# Altium PCB LEDArray8Key.PcbDoc (part 3 of 3)
Units mil, origin at the board's own origin, x right, y up, seen from the top; angles counter-clockwise.
Board outline 4724.41 x 3343 mil, 2 copper layers (Top Layer, Bottom Layer); 229 components, 203 nets, 838 pads, 171 vias.
Unrouted connection lines stored in the file: 34.
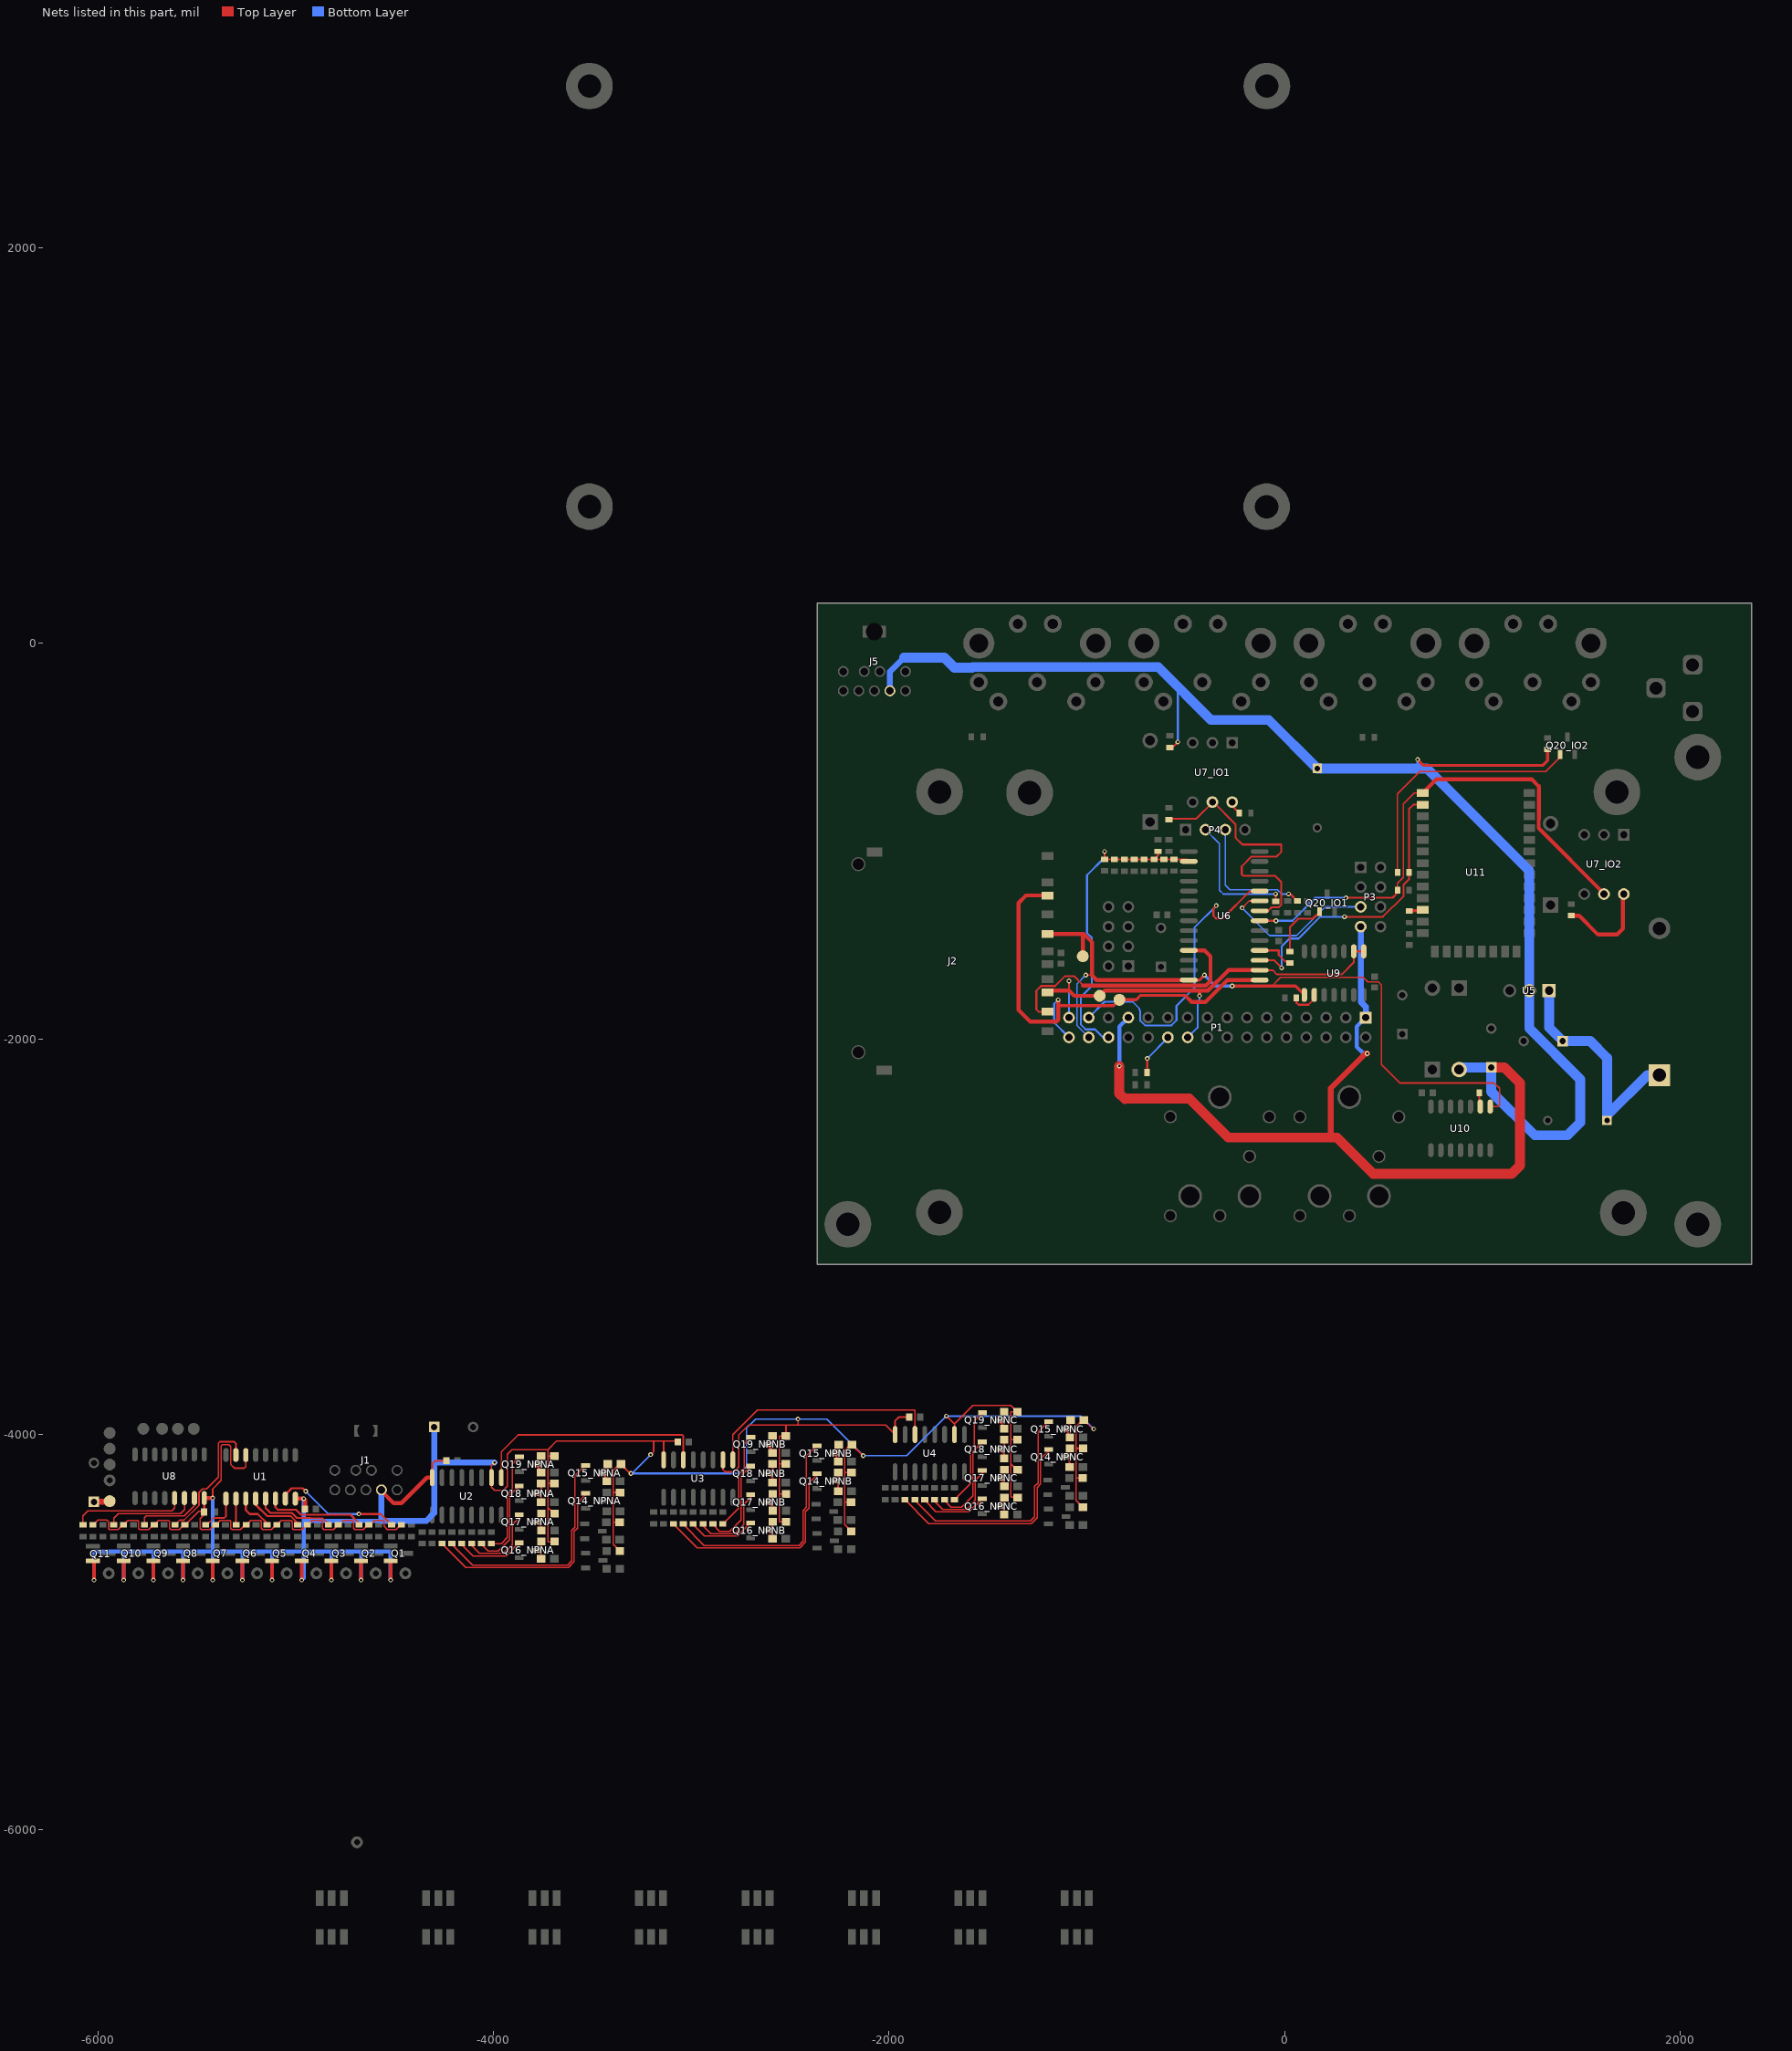
[diagram p3: the nets of this part, all layers, seen from the top]

## Via types
v1: diameter 23.62, hole 11.81, Top Layer to Bottom Layer, 171 vias

## Nets (pads, with @x,y where several pads share a name; then routed paths per layer and width w, separated by ;. In a path a pad name is that pad's centre, name@x,y a point inside that pad or via, vN(x,y) a via of type N, cw(c..) or ccw(c..) an arc to the next point about the centre after c; other vN are vias at no path point) (continued)
NetQ14_NPNA_2: Q14_NPNA.2 R9_NPNA.2 | length 1095.7
  Top Layer w6: R9_NPNA.2@-4259.92,-4557.16 R9_NPNA.2@-4259.92,-4553.1 -4139.39,-4673.63 -3621.03,-4673.63 -3591.92,-4644.52 -3591.92,-4491.21 -3574.92,-4474.21 -3574.92,-4347.52 Q14_NPNA.2@-3534.21,-4306.81
NetQ14_NPNB_1: Q14_NPNB.1 R7_NPNB.2 R8_NPNB.2 | length 90
  Top Layer w10: R7_NPNB.2@-2258.39,-4293.15 -2258.39,-4265.39 R8_NPNB.2@-2258.39,-4203.15
NetQ14_NPNB_2: Q14_NPNB.2 R9_NPNB.2 | length 1095.7
  Top Layer w6: R9_NPNB.2@-3089.92,-4457.16 R9_NPNB.2@-3089.92,-4453.1 -2969.39,-4573.63 -2451.03,-4573.63 -2421.92,-4544.52 -2421.92,-4391.21 -2404.92,-4374.21 -2404.92,-4247.52 Q14_NPNB.2@-2364.21,-4206.81
NetQ14_NPNC_1: Q14_NPNC.1 R7_NPNC.2 R8_NPNC.2 | length 90
  Top Layer w10: R7_NPNC.2@-1087.56,-4170.55 -1087.56,-4142.8 R8_NPNC.2@-1087.56,-4080.55
NetQ14_NPNC_2: Q14_NPNC.2 R9_NPNC.2 | length 1095.7
  Top Layer w6: R9_NPNC.2@-1919.09,-4334.57 R9_NPNC.2@-1919.09,-4330.5 -1798.56,-4451.03 -1280.2,-4451.03 -1251.09,-4421.92 -1251.09,-4268.61 -1234.09,-4251.61 -1234.09,-4124.92 Q14_NPNC.2@-1193.39,-4084.21
NetQ15_NPNA_1: Q15_NPNA.1 R10_NPNA.2 R11_NPNA.2 | length 104.3
  Top Layer w10: R10_NPNA.2@-3428.39,-4248.15 -3428.39,-4220.39 -3445.63,-4203.15 -3428.39,-4185.91 R11_NPNA.2@-3428.39,-4158.15
NetQ15_NPNA_2: Q15_NPNA.2 R12_NPNA.2 | length 1174.1
  Top Layer w6: R12_NPNA.2@-4209.92,-4553.1 -4209.92,-4557.16 -4105.45,-4661.63 -3626,-4661.63 -3603.92,-4639.55 -3603.92,-4486.24 -3586.92,-4469.24 -3586.92,-4209.52 -3534.63,-4157.22 Q15_NPNA.2@-3534.21,-4156.81
NetQ15_NPNB_1: Q15_NPNB.1 R10_NPNB.2 R11_NPNB.2 | length 104.3
  Top Layer w10: R10_NPNB.2@-2258.39,-4148.15 -2258.39,-4120.39 -2275.63,-4103.15 -2258.39,-4085.91 R11_NPNB.2@-2258.39,-4058.15
NetQ15_NPNB_2: Q15_NPNB.2 R12_NPNB.2 | length 1174.1
  Top Layer w6: R12_NPNB.2@-3039.92,-4453.1 -3039.92,-4457.16 -2935.45,-4561.63 -2456,-4561.63 -2433.92,-4539.55 -2433.92,-4386.24 -2416.92,-4369.24 -2416.92,-4109.52 -2364.63,-4057.22 Q15_NPNB.2@-2364.21,-4056.81
NetQ15_NPNC_1: Q15_NPNC.1 R10_NPNC.2 R11_NPNC.2 | length 104.3
  Top Layer w10: R10_NPNC.2@-1087.56,-4025.55 -1087.56,-3997.8 -1104.8,-3980.55 -1087.56,-3963.31 R11_NPNC.2@-1087.56,-3935.55
NetQ15_NPNC_2: Q15_NPNC.2 R12_NPNC.2 | length 1174.1
  Top Layer w6: R12_NPNC.2@-1869.09,-4330.5 -1869.09,-4334.57 -1764.63,-4439.03 -1285.18,-4439.03 -1263.09,-4416.95 -1263.09,-4263.64 -1246.09,-4246.64 -1246.09,-3986.92 -1193.8,-3934.63 Q15_NPNC.2@-1193.39,-3934.21
NetQ16_NPNA_1: Q16_NPNA.1 R13_NPNA.2 R14_NPNA.2 | length 108.4
  Top Layer w10: R13_NPNA.2@-3758.39,-4628.57 -3758.39,-4605.81 -3780.63,-4583.57 -3758.39,-4561.33 R14_NPNA.2@-3758.39,-4538.57
NetQ16_NPNA_2: Q16_NPNA.2 R15_NPNA.2 | length 353.6
  Top Layer w6: R15_NPNA.2@-4159.92,-4553.1 -4159.92,-4557.16 -4102.45,-4614.63 -3936.62,-4614.63 Q16_NPNA.2@-3864.21,-4542.23
NetQ16_NPNB_1: Q16_NPNB.1 R13_NPNB.2 R14_NPNB.2 | length 108.4
  Top Layer w10: R13_NPNB.2@-2588.39,-4528.57 -2588.39,-4505.81 -2610.63,-4483.57 -2588.39,-4461.33 R14_NPNB.2@-2588.39,-4438.57
NetQ16_NPNB_2: Q16_NPNB.2 R15_NPNB.2 | length 353.6
  Top Layer w6: R15_NPNB.2@-2989.92,-4453.1 -2989.92,-4457.16 -2932.45,-4514.63 -2766.62,-4514.63 Q16_NPNB.2@-2694.21,-4442.23
NetQ16_NPNC_1: Q16_NPNC.1 R13_NPNC.2 R14_NPNC.2 | length 108.4
  Top Layer w10: R13_NPNC.2@-1417.56,-4405.97 -1417.56,-4383.22 -1439.8,-4360.97 -1417.56,-4338.73 R14_NPNC.2@-1417.56,-4315.97
NetQ16_NPNC_2: Q16_NPNC.2 R15_NPNC.2 | length 353.6
  Top Layer w6: R15_NPNC.2@-1819.09,-4330.5 -1819.09,-4334.57 -1761.63,-4392.03 -1595.79,-4392.03 Q16_NPNC.2@-1523.39,-4319.63
NetQ17_NPNA_1: Q17_NPNA.1 R16_NPNA.2 R17_NPNA.2 | length 108.4
  Top Layer w10: R16_NPNA.2@-3758.39,-4488.57 -3758.39,-4465.81 Q17_NPNA.1@-3780.63,-4443.57 -3758.39,-4421.33 R17_NPNA.2@-3758.39,-4398.57
NetQ17_NPNA_2: Q17_NPNA.2 R18_NPNA.2 | length 424.4
  Top Layer w6: R18_NPNA.2@-4109.92,-4553.1 -4109.92,-4562.44 -4069.92,-4602.44 -4069.92,-4602.63 -3949.95,-4602.63 -3904.95,-4557.63 -3904.95,-4455.58 -3864.21,-4414.84 Q17_NPNA.2@-3864.21,-4399.83
NetQ17_NPNB_1: Q17_NPNB.1 R16_NPNB.2 R17_NPNB.2 | length 108.4
  Top Layer w10: R16_NPNB.2@-2588.39,-4388.57 -2588.39,-4365.81 Q17_NPNB.1@-2610.63,-4343.57 -2588.39,-4321.33 R17_NPNB.2@-2588.39,-4298.57
NetQ17_NPNB_2: Q17_NPNB.2 R18_NPNB.2 | length 424.4
  Top Layer w6: R18_NPNB.2@-2939.92,-4453.1 -2939.92,-4462.44 -2899.92,-4502.44 -2899.92,-4502.63 -2779.95,-4502.63 -2734.95,-4457.63 -2734.95,-4355.58 -2694.21,-4314.84 Q17_NPNB.2@-2694.21,-4299.83
NetQ17_NPNC_1: Q17_NPNC.1 R16_NPNC.2 R17_NPNC.2 | length 108.4
  Top Layer w10: R16_NPNC.2@-1417.56,-4265.97 -1417.56,-4243.22 Q17_NPNC.1@-1439.8,-4220.97 -1417.56,-4198.73 R17_NPNC.2@-1417.56,-4175.97
NetQ17_NPNC_2: Q17_NPNC.2 R18_NPNC.2 | length 424.4
  Top Layer w6: R18_NPNC.2@-1769.09,-4330.5 -1769.09,-4339.84 -1729.09,-4379.84 -1729.09,-4380.03 -1609.12,-4380.03 -1564.12,-4335.03 -1564.12,-4232.98 -1523.39,-4192.24 Q17_NPNC.2@-1523.39,-4177.23
NetQ18_NPNA_1: Q18_NPNA.1 R19_NPNA.2 R20_NPNA.2 | length 108.4
  Top Layer w10: R19_NPNA.2@-3758.39,-4343.57 -3758.39,-4320.81 Q18_NPNA.1@-3780.63,-4298.57 -3758.39,-4276.33 R20_NPNA.2@-3758.39,-4253.57
NetQ18_NPNA_2: Q18_NPNA.2 R21_NPNA.2 | length 487.9
  Top Layer w6: R21_NPNA.2@-4059.92,-4553.1 -4059.92,-4557.16 -4026.45,-4590.63 -3974.92,-4590.63 -3916.95,-4532.66 -3916.95,-4309.97 Q18_NPNA.2@-3864.92,-4257.94 ; Q18_NPNA.2@-3864.92,-4263.66 Q18_NPNA.2@-3864.92,-4257.94 ; Q18_NPNA.2@-3864.21,-4257.23 Q18_NPNA.2@-3864.92,-4257.94
NetQ18_NPNB_1: Q18_NPNB.1 R19_NPNB.2 R20_NPNB.2 | length 108.4
  Top Layer w10: R19_NPNB.2@-2588.39,-4243.57 -2588.39,-4220.81 Q18_NPNB.1@-2610.63,-4198.57 -2588.39,-4176.33 R20_NPNB.2@-2588.39,-4153.57
NetQ18_NPNB_2: Q18_NPNB.2 R21_NPNB.2 | length 487.9
  Top Layer w6: R21_NPNB.2@-2889.92,-4453.1 -2889.92,-4457.16 -2856.45,-4490.63 -2804.92,-4490.63 -2746.95,-4432.66 -2746.95,-4209.97 Q18_NPNB.2@-2694.92,-4157.94 ; Q18_NPNB.2@-2694.92,-4163.66 Q18_NPNB.2@-2694.92,-4157.94 ; Q18_NPNB.2@-2694.21,-4157.23 Q18_NPNB.2@-2694.92,-4157.94
NetQ18_NPNC_1: Q18_NPNC.1 R19_NPNC.2 R20_NPNC.2 | length 108.4
  Top Layer w10: R19_NPNC.2@-1417.56,-4120.97 -1417.56,-4098.22 Q18_NPNC.1@-1439.8,-4075.97 -1417.56,-4053.73 R20_NPNC.2@-1417.56,-4030.97
NetQ18_NPNC_2: Q18_NPNC.2 R21_NPNC.2 | length 487.9
  Top Layer w6: R21_NPNC.2@-1719.09,-4330.5 -1719.09,-4334.57 -1685.63,-4368.03 -1634.09,-4368.03 -1576.12,-4310.06 -1576.12,-4087.37 Q18_NPNC.2@-1524.09,-4035.34 ; Q18_NPNC.2@-1524.09,-4041.06 Q18_NPNC.2@-1524.09,-4035.34 ; Q18_NPNC.2@-1523.39,-4034.63 Q18_NPNC.2@-1524.09,-4035.34
NetQ19_NPNA_1: Q19_NPNA.1 R22_NPNA.2 R23_NPNA.2 | length 108.4
  Top Layer w10: R22_NPNA.2@-3758.39,-4203.57 -3758.39,-4180.81 -3780.63,-4158.57 -3758.39,-4136.33 R23_NPNA.2@-3758.39,-4113.57
NetQ19_NPNA_2: Q19_NPNA.2 R24_NPNA.2 | length 527.2
  Top Layer w6: R24_NPNA.2@-4009.92,-4553.1 -3959.87,-4553.1 -3928.95,-4522.18 -3928.95,-4303.15 -3904.92,-4279.12 -3904.92,-4150.18 Q19_NPNA.2@-3868.5,-4113.77
NetQ19_NPNB_1: Q19_NPNB.1 R22_NPNB.2 R23_NPNB.2 | length 108.4
  Top Layer w10: R22_NPNB.2@-2588.39,-4103.57 -2588.39,-4080.81 -2610.63,-4058.57 -2588.39,-4036.33 R23_NPNB.2@-2588.39,-4013.57
NetQ19_NPNB_2: Q19_NPNB.2 R24_NPNB.2 | length 498.3
  Top Layer w6: R24_NPNB.2@-2839.92,-4453.1 -2759.45,-4372.63 -2758.95,-4372.13 ; -2759.95,-4273.15 -2759.95,-4201.25 -2731.85,-4173.15 -2731.85,-4047.11 Q19_NPNB.2@-2698.51,-4013.77
  Top Layer w8: -2759.95,-4372.13 -2759.95,-4273.15
NetQ19_NPNC_1: Q19_NPNC.1 R22_NPNC.2 R23_NPNC.2 | length 108.4
  Top Layer w10: R22_NPNC.2@-1417.56,-3980.97 -1417.56,-3958.22 -1439.8,-3935.97 -1417.56,-3913.73 R23_NPNC.2@-1417.56,-3890.97
NetQ19_NPNC_2: Q19_NPNC.2 R24_NPNC.2 | length 497.9
  Top Layer w6: R24_NPNC.2@-1669.09,-4330.5 -1588.12,-4249.53 -1588.12,-4071.35 -1569.92,-4053.15 -1569.92,-3933.41 Q19_NPNC.2@-1527.68,-3891.17
NetQ20_IO1_2: Q20_IO1.2 R65_IO1.1 | length 305.6
  Top Layer w10: R65_IO1.1@27.27,-1558.62 27.27,-1435.96 70.08,-1393.15 141.97,-1393.15 Q20_IO1.2@177.68,-1357.44
NetQ20_IO2_2: Q20_IO2.2 R65_IO2.1 | length 1309
  Top Layer w8: R65_IO2.1@570.55,-1158.15 570.55,-762.66 683.83,-649.39 1320.08,-649.39 1391.97,-577.5 Q20_IO2.2@1391.97,-563.15
  Top Layer w10: Q20_IO2.2@1391.97,-563.15 Q20_IO2.2@1392.68,-562.44
NetR25_1: R25.1 U1.15 | length 719.1
  Top Layer w10: U1.15@-5051.92,-4332.08 U1.15@-5051.92,-4325.39 -5051.92,-4305.11 -5019.97,-4273.15 -4964.21,-4273.15 v1(-4949.1,-4288.26) ; v1(-4679.92,-4403.15) -4570.39,-4403.15 R25.1@-4514.92,-4458.62 ; -4560.92,-4412.15 R25.1@-4514.92,-4458.15
  Bottom Layer w10: v1(-4949.1,-4288.26) -4834.21,-4403.15 v1(-4679.92,-4403.15)
NetR26_1: R26.1 U1.14 | length 508.1
  Top Layer w10: U1.14@-5101.92,-4325.39 -5101.92,-4369.15 -5089.92,-4381.15 -4998.5,-4381.15 -4972.78,-4406.87 -4722.65,-4406.87 -4679.92,-4449.6 R26.1@-4679.92,-4458.62
NetR27_1: R27.1 U1.13 | length 404.1
  Top Layer w6: -4924.92,-4423.15 -4864.2,-4423.15 -4834.92,-4452.43 R27.1@-4834.92,-4458.62
  Top Layer w10: U1.13@-5151.92,-4325.39 -5151.92,-4373.65 -5128.42,-4397.15 -5019.74,-4397.15 -4993.74,-4423.15 -4924.92,-4423.15
NetR28_1: R28.1 U1.12 | length 290.5
  Top Layer w10: U1.12@-5201.92,-4325.39 -5201.92,-4356.15 -5144.92,-4413.15 -5026.37,-4413.15 -4989.92,-4449.6 R28.1@-4989.92,-4458.62
NetR29_1: R29.1 U1.11 | length 224.9
  Top Layer w6: U1.11@-5254.92,-4351.34 U1.11@-5254.92,-4328.15
  Top Layer w10: U1.11@-5251.92,-4325.39 -5251.92,-4383.79 -5232.56,-4403.15 -5191.37,-4403.15 -5144.92,-4449.6 R29.1@-5144.92,-4458.62
NetR30_1: R30.1 U1.10 | length 136.9
  Top Layer w6: U1.10@-5301.92,-4325.39 U1.10@-5299.92,-4327.39
  Top Layer w10: U1.10@-5301.92,-4325.39 -5301.92,-4456.62 R30.1@-5299.92,-4458.62
NetR31_1: R31.1 U1.9 | length 210.6
  Top Layer w8: R31.1@-5454.92,-4458.62 -5450.56,-4458.62 -5414.78,-4422.84 -5359.92,-4422.84 -5351.92,-4414.84 U1.9@-5351.92,-4325.39
NetR32_1: R32.1 U1.7 | length 684.3
  Top Layer w8: R32.1@-5608.62,-4458.62 R32.1@-5609.92,-4458.62 -5586.14,-4434.84 -5564.84,-4434.84 -5488.14,-4358.15 -5488.14,-4293.32 -5471.77,-4276.95 -5450.51,-4276.95 -5390.14,-4216.58 -5390.14,-4044.59 -5383.71,-4038.15 -5309.92,-4038.15 -5301.92,-4046.15 U1.7@-5301.92,-4104.91
NetR33_1: R33.1 U8.15 | length 359.1
  Top Layer w6: R33.1@-5759.15,-4458.62 R33.1@-5764.92,-4458.62 -5764.92,-4422.15 -5754.92,-4412.15 -5563.23,-4412.15 -5511.92,-4360.84 U8.15@-5511.92,-4322.39
NetR34_1: R34.1 U8.14 | length 467.9
  Top Layer w6: R34.1@-5919.92,-4458.62 -5919.92,-4425.15 -5894.92,-4400.15 -5581.92,-4400.15 -5561.92,-4380.15 U8.14@-5561.92,-4322.39
NetR35_1: R35.1 U8.13 | length 576.2
  Top Layer w6: R35.1@-6074.92,-4458.62 -6074.92,-4413.15 -6049.92,-4388.15 -5626.26,-4388.15 -5611.92,-4373.81 U8.13@-5611.92,-4322.39
NetR60_IO1_1: R60_IO1.1 U7_IO1.6 | length 76.1
  Top Layer w10: U7_IO1.6@-260.39,-798.62 U7_IO1.6@-264.92,-803.15 -264.92,-822.68 R60_IO1.1@-229.45,-858.15
NetR60_IO2_1: R60_IO2.1 U7_IO2.6 | length 493.3
  Top Layer w20: R60_IO2.1@1450.08,-1377.68 1489.61,-1377.68 1585.08,-1473.15 1680.08,-1473.15 1710.08,-1443.15 1710.08,-1269.12 1709.11,-1268.15 U7_IO2.6@1715.08,-1268.15
NetR62_1: R62.1 U9.9 | length 151.5
  Top Layer w10: R62.1@59.61,-1793.15 59.61,-1817.68 70.08,-1828.15 120.08,-1828.15 150.08,-1798.15 U9.9@150.08,-1778.39
NetR80_1: R80.1 U10.9 | length 61.6
  Top Layer w10: R80.1@985.25,-2283.15 985.25,-2338.39 U10.9@989.78,-2342.91
NetR81_2: R81.2 U11.11 | length 69.8
  Top Layer w15: R81.2@630.08,-1352.14 694.36,-1352.14 U11.11@698.27,-1348.23
NetU2_9: U2.9 U3.14 | length 1209.8
  Top Layer w8: U2.9@-3959.92,-4219.08 -3959.92,-4088.15 -3874.92,-4003.15 -3044.92,-4003.15 -3039.48,-4008.59 U3.14@-3039.48,-4129.6
NetU3_9: U3.9 U4.14 | length 1221.9
  Top Layer w6: U3.9@-2789.48,-4129.6 -2789.48,-4002.71 -2664.92,-3878.15 -1869.09,-3878.15 -1869.09,-4000.73 U4.14@-1868.8,-4001.02
PGCLK: P4.3 R74.1 | length 678.5
  Top Layer w10: v1(20.08,-1268.15) 29.13,-1268.15 R74.1@65.08,-1304.09
  Bottom Layer w8: P4.3@-299.92,-943.15 -299.92,-1223.15 -276.73,-1246.34 -35.89,-1246.34 -14.08,-1268.15 v1(20.08,-1268.15)
PGDAT: P4.2 R76.1 | length 662.8
  Top Layer w8: R76.1@-44.92,-1303.62 v1(-44.92,-1268.15)
  Bottom Layer w8: P4.2@-399.92,-943.15 -329.92,-1013.15 -329.92,-1248.15 -309.92,-1268.15 v1(-44.92,-1268.15)
RD: P1.22 R78.1 | length 221.4
  Top Layer w10: R78.1@-695.47,-2170.87 -694.17,-2169.57 v1(-694.17,-2100)
  Bottom Layer w10: v1(-694.17,-2100) -589.92,-1995.75 P1.22@-589.92,-1993.15
RX1: R61_IO1.1 U6.22 U7_IO1.5 | length 1495.9
  Top Layer w10: R61_IO1.1@-584.92,-887.68 -446.82,-887.68 -364.92,-805.78 U7_IO1.5@-364.92,-803.15 -360.17,-803.15 -248.32,-915 -248.32,-983.15 -213.32,-1018.15 -16.21,-1018.15 -16.21,-1054.65 -40.7,-1079.15 -167.83,-1079.15 -216.83,-1128.15 -216.83,-1168.15 -209.01,-1175.96 -48.39,-1175.96 -16.21,-1208.15 -16.21,-1322.96 -28.87,-1335.63 -64.92,-1335.63 -82.45,-1353.15 U6.22@-125.79,-1353.15
RX2: R61_IO2.1 U6.21 U7_IO2.5 U11.1 | length 2634.6
  Top Layer w8: R61_IO2.1@570.55,-1248.15 570.55,-1214.35 600.08,-1184.82 600.08,-812.68 655.08,-757.68 U11.1@698.27,-757.68
  Top Layer w10: U6.21@-125.79,-1403.15 v1(-43.6,-1403.15) ; v1(310.08,-1287.18) 546.05,-1287.18 R61_IO2.1@570.08,-1263.15
  Top Layer w20: U11.1@698.27,-757.68 767.79,-688.15 1250.08,-688.15 1285.08,-723.15 1285.08,-888.57 1284.71,-888.94 1284.71,-935.18 1615.08,-1265.55 U7_IO2.5@1615.08,-1268.15
  Bottom Layer w10: v1(-43.6,-1403.15) 40.08,-1403.15 156.05,-1287.18 v1(310.08,-1287.18)
SD_CS: J2.1 U6.11 | length 1344.4
  Top Layer w10: J2.1@-1197.84,-1863.31 -1243.16,-1863.31 -1254.92,-1851.55 -1254.92,-1757.2 -1231.92,-1734.2 -1230.97,-1734.2 -1229.92,-1733.15 -1159.92,-1733.15 -1109.92,-1683.15 -1064.92,-1683.15 -1019.92,-1728.15 -1019.92,-1730.96
  Top Layer w20: -1019.92,-1730.96 -397.73,-1730.96 -374.92,-1708.15 -374.92,-1583.15 -404.92,-1553.15 U6.11@-484.06,-1553.15
SPARE: P3.5 U6.23 | length 821.7
  Top Layer w8: v1(-214.92,-1338.15) -179.92,-1303.15 U6.23@-125.79,-1303.15
  Bottom Layer w8: v1(-214.92,-1338.15) -74.92,-1478.15 60.08,-1478.15 205.08,-1333.15 P3.5@385.08,-1333.15
SPI_CLK: J2.5 P1.30 pad.0@-1019.97,-1583.15 U6.14 U9.8 U10.8 | length 3940.7
  Top Layer w8: v1(-1004.92,-1678.15) -974.92,-1678.15 ; -65,-1733.15 -63.15,-1733.15 -20,-1690 396.85,-1690 420,-1713.15 475.08,-1713.15 476.89,-1714.96 ; 476.94,-1714.96 490.08,-1728.1 490.08,-2129.7 584.57,-2224.19 1060.08,-2224.19 1087.09,-2251.19 1087.09,-2333.15 1077.32,-2342.91 U10.8@1039.78,-2342.91
  Top Layer w15: U6.14@-484.06,-1703.15 -429.92,-1703.15 v1(-404.92,-1678.15) ; v1(-264.92,-1733.15) -65,-1733.15 ; -63.15,-1733.15 54.84,-1733.15 U9.8@100.08,-1778.39
  Top Layer w20: J2.5@-1197.84,-1469.61 -1016.27,-1469.61 ; pad.0@-1019.97,-1583.15 -1019.97,-1473.31 -1016.27,-1469.61 ; -974.92,-1678.15 -974.92,-1554.61 ; U6.14@-484.06,-1703.15 -949.92,-1703.15 -972.73,-1680.34 -972.73,-1513.15 -1016.27,-1469.61
  Bottom Layer w8: v1(-1004.92,-1678.15) -1049.92,-1723.15 -1049.92,-1933.15 P1.30@-989.92,-1993.15
  Bottom Layer w15: v1(-404.92,-1678.15) -349.92,-1733.15 v1(-264.92,-1733.15)
SPI_MISO: J2.7 P1.32 pad.0@-834.92,-1803.15 U6.15 | length 2365.6
  Top Layer w10: -499.3,-1778.96 -498.13,-1780.13
  Top Layer w15: -1144.83,-1833.15 -864.92,-1833.15 pad.0@-834.92,-1803.15 -750.36,-1803.15 -727.67,-1780.46 -499.3,-1780.46
  Top Layer w20: J2.7@-1197.84,-1275.51 -1307.28,-1275.51 -1344.92,-1313.15 -1344.92,-1854.23 -1286,-1913.15 -1153.83,-1913.15 -1144.83,-1904.15 -1144.83,-1833.15 v1(-1144.83,-1803.06) ; -500.95,-1782.96 -469.76,-1814.15 -399.92,-1814.15 -288.92,-1703.15 U6.15@-125.79,-1703.15
  Bottom Layer w10: v1(-1144.83,-1803.06) -1164.92,-1823.15 -1164.92,-1918.15 P1.32@-1089.92,-1993.15
SPI_MOSI: J2.2 P1.20 P1.31 pad.0@-934.92,-1783.15 U6.16 U9.1 U9.2 | length 2250.6
  Top Layer w10: -1089.92,-1756.96 v1(-1089.92,-1708.15) ; U6.16@-125.79,-1653.15 -59.92,-1653.15 -38.07,-1675 288.23,-1675 350.08,-1613.15 U9.2@350.08,-1557.91 U9.1@400.08,-1557.91
  Top Layer w20: J2.2@-1197.84,-1764.88 -1189.91,-1756.96 -1089.92,-1756.96 -1063.73,-1783.15 pad.0@-934.92,-1783.15 -908.73,-1756.96 -429.92,-1756.96 ; v1(-429.92,-1783.15) -429.92,-1756.96 ; U6.16@-125.79,-1653.15 -283.15,-1653.15 -386.96,-1756.96 -429.92,-1756.96
  Bottom Layer w10: P1.31@-1089.92,-1893.15 v1(-1089.92,-1708.15) ; P1.20@-489.92,-1993.15 -439.92,-1943.15 -439.92,-1813.15 -429.92,-1803.15 v1(-429.92,-1783.15)
TP_CS: P1.29 U6.24 | length 1595.3
  Top Layer w10: v1(-344.92,-1326.55) -359.5,-1341.13 -359.5,-1378.57 -344.92,-1393.15 -314.92,-1393.15 -174.92,-1253.15 U6.24@-125.79,-1253.15
  Bottom Layer w8: -768.01,-1813.15 -734.7,-1846.46 -734.7,-1852.18 -729.45,-1857.43 -729.45,-1909.52 -706.29,-1932.68 -572.13,-1932.68 -571.61,-1932.15
  Bottom Layer w10: P1.29@-989.92,-1898.15 P1.29@-989.92,-1893.15 -909.92,-1813.15 -768.01,-1813.15 ; -571.61,-1932.15 -546.45,-1906.99 -546.45,-1833.58 -455.92,-1743.05 -455.92,-1437.55 v1(-344.92,-1326.55)
TP_IRQ: P1.28 R59.1 R66.2 R67.2 R68.1 R69.2 R70.1 R71.1 R72.1 R73.1 U6.2 | length 1632.3
  Top Layer w10: v1(-909.92,-1053.15) -909.92,-1093.62 -860.39,-1093.62 R71.1@-859.92,-1093.15 -859.61,-1092.84 -709.92,-1092.84 R69.2@-659.61,-1092.84 ; R69.2@-659.92,-1093.15 R69.2@-659.61,-1092.84 ; R59.1@-639.92,-1052.68 -639.92,-1073.15 R69.2@-659.61,-1092.84 ; U6.2@-484.06,-1103.15 -494.37,-1092.84 R66.2@-559.06,-1092.84 R69.2@-659.61,-1092.84
  Bottom Layer w10: v1(-909.92,-1053.15) -909.92,-1083.78 -998.92,-1172.78 -998.92,-1465.16 -974.08,-1490 -974.08,-1732.31 -1029.92,-1788.15 -1029.92,-1875.31 -1030.45,-1875.84 -1030.45,-1927.62 -1005.45,-1952.62 -958.08,-1952.62 -917.55,-1993.15 P1.28@-889.92,-1993.15
TX1: R65_IO1.2 U6.18 | length 193.3
  Top Layer w10: U6.18@-125.79,-1553.15 -29.45,-1553.15 -29.45,-1576.25 3.45,-1609.15 18.74,-1609.15 R65_IO1.2@27.27,-1617.68
TX2: R65_IO2.2 U6.17 U11.2 | length 1486.4
  Top Layer w10: U6.17@-125.79,-1603.15 -53.28,-1603.15 v1(-14.92,-1641.51) ; v1(302.86,-1383.15) 497.02,-1383.15 602.07,-1278.1 602.07,-1220.23 629.61,-1192.69 R65_IO2.2@629.61,-1158.15 629.61,-838.62 651.5,-816.73 U11.2@698.27,-816.73
  Bottom Layer w10: v1(-14.92,-1641.51) -14.92,-1533.07 25,-1493.15 70.53,-1493.15 180.53,-1383.15 v1(302.86,-1383.15)
VCC: C1.1 C2.1 C3.2 C4.2 C5.2 C7.1 C14.1 C15.1 C17.1 D1.1 J1.8 J5.8 P1.1 P1.25 P3.7 pad.0@-5939.92,-4338.15 Q1.2 Q2.2 Q3.2 Q4.2 Q5.2 Q6.2 Q7.2 Q8.2 Q9.2 Q10.2 Q11.2 R2_NPNA.1 R2_NPNB.1 R2_NPNC.1 R5_NPNA.1 R5_NPNB.1 R5_NPNC.1 R8_NPNA.1 R8_NPNB.1 R8_NPNC.1 R11_NPNA.1 R11_NPNB.1 R11_NPNC.1 R14_NPNA.1 R14_NPNB.1 R14_NPNC.1 R17_NPNA.1 R17_NPNB.1 R17_NPNC.1 R20_NPNA.1 R20_NPNB.1 R20_NPNC.1 R23_NPNA.1 R23_NPNB.1 R23_NPNC.1 R36.1 R37.1 R38.1 R39.1 R40.1 R41.1 R42.1 R43.1 R44.1 R45.1 R46.1 R64_IO1.2 R64_IO2.2 U1.6 U1.16 U2.10 U2.16 U3.10 U3.16 U4.10 U4.16 U5.3 U8.16 | length 31348.3
  Top Layer w6: R46.1@-6024.92,-4458.62 -5999.45,-4433.15 -5954.92,-4433.15 -5946.64,-4441.43 -5946.64,-4476.13 -5941.37,-4481.4 -5898.48,-4481.4 -5875.7,-4458.62 R45.1@-5869.92,-4458.62 -5847.14,-4435.84 -5798.48,-4435.84 -5793.21,-4441.12 -5793.21,-4474.56 -5786.37,-4481.4 -5743.48,-4481.4 -5720.7,-4458.62 R44.1@-5714.92,-4458.62 -5692.14,-4435.84 -5643.48,-4435.84 -5638.21,-4441.12 -5638.21,-4474.56 -5631.37,-4481.4 -5588.48,-4481.4 -5565.7,-4458.62 R43.1@-5559.92,-4458.62 -5490.01,-4388.71 -5461.92,-4388.71 -5461.92,-4406.9 -5481.64,-4426.61 -5481.64,-4476.13 -5476.37,-4481.4 -5433.48,-4481.4 -5410.7,-4458.62 R42.1@-5404.92,-4458.62 -5382.14,-4435.84 -5333.48,-4435.84 -5328.21,-4441.12 -5328.21,-4474.56 -5321.37,-4481.4 -5278.48,-4481.4 -5255.7,-4458.62 R41.1@-5249.92,-4458.62 -5227.14,-4435.84 -5178.48,-4435.84 -5173.21,-4441.12 -5173.21,-4474.56 -5166.37,-4481.4 -5123.48,-4481.4 -5100.7,-4458.62 R40.1@-5094.92,-4458.62 -5072.14,-4435.84 -5023.48,-4435.84 -5016.64,-4442.68 -5016.64,-4476.13 -5011.37,-4481.4 -4968.48,-4481.4 -4945.7,-4458.62 R39.1@-4939.92,-4458.62 -4917.14,-4435.84 -4868.48,-4435.84 -4863.21,-4441.12 -4863.21,-4474.56 -4856.37,-4481.4 -4808.48,-4481.4 -4785.7,-4458.62 R38.1@-4784.92,-4458.62 -4779.92,-4458.62 -4757.14,-4435.84 -4713.48,-4435.84 -4708.21,-4441.12 -4708.21,-4474.56 -4704.62,-4478.15 ; -4704.92,-4478.15 -4704.62,-4478.15 ; R36.1@-4464.92,-4458.62 -4470.7,-4458.62 -4493.48,-4481.4 -4536.37,-4481.4 -4553.21,-4464.56 -4553.21,-4441.12 -4558.48,-4435.84 -4601.37,-4435.84 -4624.15,-4458.62 R37.1@-4629.92,-4458.62 -4635.7,-4458.62 -4658.48,-4481.4 -4701.37,-4481.4 -4704.62,-4478.15 ; v1(-3994.92,-4143.15) -4009.92,-4158.15 U2.10@-4009.92,-4219.08 -4009.92,-4268.15 -3994.92,-4283.15 -3949.92,-4283.15 -3928.92,-4262.15 -3928.92,-4100.18 -3906.89,-4078.15 -3724.92,-4078.15 -3724.92,-4109.63 ; R20_NPNA.1@-3691.46,-4249.63 -3724.92,-4249.63 ; R23_NPNA.1@-3691.46,-4109.63 -3724.92,-4109.63 ; R14_NPNA.1@-3690.94,-4542.6 -3691.49,-4543.15 -3724.92,-4543.15 -3724.92,-4371.17 ; R17_NPNA.1@-3690.75,-4401.17 -3694.92,-4401.17 -3724.92,-4371.17 ; R2_NPNA.1@-3361.46,-4589.21 -3394.92,-4555.75 -3394.92,-4444.21 ; R5_NPNA.1@-3361.46,-4444.21 -3394.92,-4444.21 ; R11_NPNA.1@-3361.46,-4149.21 -3365.93,-4153.68 -3394.92,-4182.68 -3394.92,-4444.21 ; R20_NPNB.1@-2521.46,-4149.63 -2554.92,-4149.63 ; R23_NPNB.1@-2521.46,-4009.63 -2554.92,-4009.63 -2554.92,-4149.63 ; R14_NPNB.1@-2520.94,-4442.6 -2521.49,-4443.15 -2554.92,-4443.15 -2554.92,-4303.15 ; R17_NPNB.1@-2520.75,-4301.17 -2552.94,-4301.17 -2554.92,-4303.15 ; R2_NPNB.1@-2191.46,-4489.21 -2224.92,-4455.75 -2224.92,-4344.21 ; R5_NPNB.1@-2191.46,-4344.21 -2224.92,-4344.21 ; R11_NPNB.1@-2191.46,-4049.21 -2195.93,-4053.68 -2224.92,-4082.68 -2224.92,-4193.15 ; R8_NPNB.1@-2189.39,-4192.23 R8_NPNB.1@-2189.39,-4193.97 -2224.1,-4193.97 -2224.92,-4193.15 ; v1(-1709.92,-3908.15) -1668.8,-3949.27 ; U4.10@-1668.8,-4001.02 -1668.8,-3949.27 ; R20_NPNC.1@-1350.63,-4027.03 -1384.09,-4027.03 ; R14_NPNC.1@-1350.11,-4320 -1351.97,-4318.15 -1379.92,-4318.15 -1384.09,-4313.98 -1384.09,-4148.57 ; R17_NPNC.1@-1349.92,-4178.57 -1354.09,-4178.57 -1384.09,-4148.57 ; R2_NPNC.1@-1020.63,-4366.61 -1054.09,-4333.15 -1054.09,-4221.61 ; R5_NPNC.1@-1020.63,-4221.61 -1054.09,-4221.61 ; R11_NPNC.1@-1020.63,-3926.61 -1025.1,-3931.08 -1054.09,-3960.08 -1054.09,-4221.61 ; -3724.92,-4371.17 -3724.92,-4249.63 ; -3724.92,-4249.63 -3724.92,-4109.63 ; -2554.92,-4303.15 -2554.92,-4149.63 ; -2224.92,-4344.21 -2224.92,-4193.15 ; -1668.8,-3949.27 -1668.8,-3947.03 -1574.92,-3853.15 -1384.51,-3853.15 R23_NPNC.1@-1350.63,-3887.03 -1384.09,-3887.03 -1384.09,-4027.03 ; -1384.09,-4148.57 -1384.09,-4027.03
  Top Layer w8: v1(-5419.3,-4322.39) -5419.3,-4276.31 -5376.14,-4233.16 -5376.14,-4058.22 -5370.92,-4053 -5337,-4053 -5328.14,-4061.86 -5328.14,-4152.86 -5310,-4171 -5260,-4171 -5251.92,-4162.92 U1.6@-5251.92,-4104.91 ; -3724.92,-4078.15 -3681.4,-4034.63 -3189.92,-4034.63 ; -3394.67,-4293.15 -3393.84,-4293.97 R8_NPNA.1@-3359.39,-4293.97 ; v1(-3204.92,-4103.15) -3189.92,-4088.15 -3189.92,-4034.63 ; U3.16@-3139.48,-4129.6 -3139.48,-4035.07 -3139.92,-4034.63 ; C4.2@-3067.48,-4038.15 -3071,-4034.63 -3139.92,-4034.63 ; U3.10@-2839.48,-4129.6 -2839.48,-4178.59 -2828.44,-4189.63 -2808.71,-4189.63 -2808.42,-4189.93 -2783.98,-4189.93 -2759.92,-4165.87 -2759.92,-4003.15 -2709.92,-3953.15 -2464.92,-3953.15 ; v1(-2459.92,-3923.15) -2459.92,-3948.15 -2464.92,-3953.15 ; U4.16@-1969.92,-3999.9 -2016.67,-3953.15 -2464.92,-3953.15 ; R11_NPNC.1@-1014.92,-3928.15 -969.92,-3973.15 v1(-964.92,-3973.15) ; -3189.92,-4034.63 -3139.92,-4034.63
  Top Layer w10: C1.1@-5461.92,-4388.71 U8.16@-5461.92,-4322.39 ; U2.16@-4309.92,-4215.14 -4309.92,-4149.63 -4294.92,-4134.63 C3.2@-4237.48,-4134.63 ; R11_NPNA.1@-3355.75,-4150.75 -3308.35,-4198.15 v1(-3304.92,-4198.15) ; R23_NPNB.1@-2521.46,-4009.63 -2521.46,-3954.69 ; R11_NPNB.1@-2186.02,-4054.6 -2132.47,-4108.15 v1(-2129.92,-4108.15) ; U4.16@-1968.8,-4001.02 -1969.92,-3999.9 -1969.92,-3933.15 -1949.92,-3913.15 C5.2@-1897.48,-3913.15 ; -1051.07,-4071.38 R8_NPNC.1@-1018.56,-4071.38 ; R64_IO1.2@-579.92,-527.68 -567.82,-527.68 v1(-539.92,-499.78)
  Top Layer w15: v1(672.94,-588.15) 702.68,-617.89 1305.08,-617.89 1329.61,-593.36 R64_IO2.2@1329.61,-537.68
  Top Layer w20: v1(-6019.3,-4737.15) Q11.2@-6019.3,-4639.55 ; v1(-5869.3,-4737.15) Q10.2@-5869.3,-4639.55 ; v1(-5719.3,-4737.15) Q9.2@-5719.3,-4639.55 ; v1(-5569.3,-4737.15) Q8.2@-5569.3,-4639.55 ; U8.16@-5461.92,-4322.39 v1(-5419.3,-4322.39) ; v1(-5419.3,-4737.15) -5419.3,-4689.4 Q7.2@-5419.3,-4639.55 ; v1(-5269.3,-4737.15) Q6.2@-5269.3,-4639.55 ; v1(-5119.3,-4737.15) -5119.3,-4664.55 Q5.2@-5119.3,-4639.55 ; U1.16@-5001.92,-4325.39 v1(-4959.3,-4325.39) -4952.48,-4332.21 C2.1@-4952.48,-4378.15 ; v1(-4969.3,-4737.15) -4969.3,-4698.15 Q4.2@-4969.3,-4639.55 ; v1(-4819.3,-4737.15) Q3.2@-4819.3,-4639.55 ; v1(-4669.3,-4737.15) Q2.2@-4669.3,-4639.55 ; J1.8@-4565.59,-4281.22 -4565.59,-4287.48 -4504.92,-4348.15 -4464.92,-4348.15 -4335.85,-4219.08 U2.16@-4309.92,-4219.08 ; v1(-4519.3,-4737.15) Q1.2@-4519.3,-4639.55
  Top Layer w30: C15.1@-6019.96,-4341.58 -5943.35,-4341.58 pad.0@-5939.92,-4338.15 ; 230,-2499.78 234.08,-2495.7 234.08,-2250 409.08,-2075 v1(417.44,-2075)
  Top Layer w50: v1(-835.45,-2138.15) -835.45,-2276.93 -807.38,-2305 -805.3,-2302.93 -481.85,-2302.93 -285,-2499.78 230,-2499.78 265.08,-2499.78 448.45,-2683.15 1148.37,-2683.15 1190.08,-2641.44 1190.08,-2223.15 1112.22,-2145.29 C7.1@1045.08,-2145.29
  Bottom Layer w6: v1(-2129.92,-4108.15) -1909.92,-4108.15 v1(-1709.92,-3908.15)
  Bottom Layer w8: v1(-3304.92,-4198.15) -3299.92,-4198.15 v1(-3204.92,-4103.15) ; -2774.92,-4198.15 -2754.92,-4198.15 -2719.92,-4163.15 -2719.92,-3968.15 -2674.92,-3923.15 v1(-2459.92,-3923.15) -2314.92,-3923.15 v1(-2129.92,-4108.15) ; v1(-1709.92,-3908.15) -1029.92,-3908.15 v1(-964.92,-3973.15)
  Bottom Layer w10: v1@-3299.92,-4198.15 -2774.92,-4198.15 ; -658.6,-123.15 -539.92,-241.83 v1(-539.92,-499.78)
  Bottom Layer w15: 672.94,-633.15 v1(672.94,-588.15)
  Bottom Layer w20: v1(-6019.3,-4737.15) -6019.3,-4593.81 -6019.96,-4593.15 -5419.3,-4593.15 ; v1(-5869.3,-4737.15) -5869.3,-4593.77 ; v1(-5719.3,-4737.15) -5719.3,-4593.77 ; v1(-5569.3,-4737.15) -5569.3,-4593.77 ; v1(-5419.3,-4737.15) -5419.3,-4593.15 ; v1(-5419.3,-4322.39) -5419.3,-4593.15 ; v1(-5269.3,-4737.15) -5269.3,-4593.77 ; v1(-5119.3,-4737.15) -5119.3,-4593.77 ; v1(-4969.3,-4737.15) -4959.3,-4727.15 -4959.3,-4593.15 ; v1(-4959.3,-4325.39) -4959.3,-4438.15 ; v1(-4819.3,-4737.15) -4819.3,-4593.77 ; v1(-4669.3,-4737.15) -4669.3,-4593.77 -4669.92,-4593.15 ; -4565.59,-4437.48 -4564.92,-4438.15 -4959.3,-4438.15 ; v1(-4519.3,-4737.15) -4519.92,-4736.53 -4519.92,-4593.15 -4669.92,-4593.15 ; v1(-835.45,-2138.15) -835.45,-1938.68 P1.25@-789.92,-1893.15 ; P1.1@410.08,-1893.15 364.55,-1938.68 364.55,-2040 399.55,-2075 v1(417.44,-2075) ; -5419.3,-4593.15 -4959.3,-4593.15 ; -4959.3,-4593.15 -4669.92,-4593.15 ; -4959.3,-4593.15 -4959.3,-4438.15
  Bottom Layer w30: J1.8@-4565.59,-4281.22 -4565.59,-4437.48 -4338.83,-4437.48 -4299.5,-4398.15 -4299.5,-4143.15 ; C14.1@-4299.5,-3963.15 -4299.5,-4143.15 ; v1(-3994.92,-4143.15) -4299.5,-4143.15 ; J5.8@-1995.03,-241.22 -1995.03,-143.82 -1924.36,-73.15 ; P3.7@385.08,-1433.15 385.08,-1813.15 410.08,-1838.15 P1.1@410.08,-1893.15
  Bottom Layer w50: -1924.36,-73.15 -1719.36,-73.15 -1669.36,-123.15 -1580.1,-123.15 -1577.53,-120.58 -639.15,-120.58 -371.87,-387.85 -80.22,-387.85 C17.1@165.08,-633.15 672.94,-633.15 720.08,-633.15 1237.5,-1150.57 U5.3@1237.5,-1757.09 1237.5,-1947.09 1495.08,-2204.66 1495.08,-2423.15 1430.08,-2488.15 1265.08,-2488.15 1045.08,-2268.15 C7.1@1045.08,-2145.29 892.95,-2145.29 D1.1@882.5,-2155.74
VIN: C6.1 C16.1 D5.2 U5.1 | length 1183.3
  Bottom Layer w50: U5.1@1337.5,-1757.09 1337.5,-1943.66 C6.1@1405.93,-2012.09 1545.08,-2012.09 1630.08,-2097.09 1630.08,-2388.15 1834.21,-2184.02 D5.2@1895.08,-2184.02
pads on no net: J2. J2.8 J2.9 J2.CD J2.WP J3_IO1.1 J3_IO1.2 J3_IO1.3 J3_IO2.1 J3_IO2.2 J3_IO2.3 J4_IO1.1 J4_IO1.2 J4_IO1.3 J4_IO2.1 J4_IO2.2 J4_IO2.3 J7.MNT J7.RING J7.RING_SH J7.TIP_SH J8.MNT J8.RING J8.RING_SH J8.TIP_SH P1.24 U4.9 U7_IO1.3 U7_IO2.3 U8.7 U8.9 U8.10 U8.11 U8.12 U11.3 U11.4 U11.5 U11.6 U11.7 U11.8 U11.9 U11.10 U11.14 U11.15 U11.16 U11.17 U11.18 U11.19 U11.20 U11.23 U11.24 U11.25 U11.26 U11.27 U11.28 U11.29 U11.30 U11.31 U11.32 U11.33 U11.34

## Polygon pours and split planes (outlines as drawn)
VCC on Bottom Layer "LC_VCC_B" (hatched 90Degree grid 7.87 track 8, remove dead copper, pour order 24): -6115.01,-4765 -6115.01,-3855 cw(c-6110,-3855) -6113.53,-3851.44 -6113.55,-3851.45 -6088.55,-3826.45 -6088.56,-3826.47 cw(c-6085,-3830) -6085,-3824.98 -500,-3824.98 cw(c-500,-3830) -495,-3829.61 cw(c-490,-3830) -484.98,-3830 -484.98,-4765 cw(c-490,-4765) -490,-4770.01 -880,-4770.01 cw(c-880,-4765) -880.05,-4770.01 -6110,-4770.01 cw(c-6110,-4765)
+3V3 on Bottom Layer "MB_3V3_B" (hatched 45Degree grid 7.87 track 8, remove dead copper, pour order 10): -1402.53,-2247.47 -1500,-2150 -1500,-900 -900,-900 -750,-750 600,-750 750,-900 750,-2000 800,-2050 800,-2247.47
VCC on Bottom Layer "MB_VCC_B" (hatched 45Degree grid 7.87 track 8, remove dead copper, pour order 11): -2367.22,-3140.15 -2367.22,202.85 cw(c-2362.2,202.85) -2362.2,207.87 2362.2,207.87 cw(c2362.2,202.85) 2367.22,202.85 cw(c2362.2,202.85) 2362.2,197.84 1555.02,197.84 1555.02,-3135.13 2362.2,-3135.13 cw(c2362.2,-3140.15) 2367.22,-3140.15 cw(c2362.2,-3140.15) 2362.2,-3145.16 -2362.2,-3145.16 cw(c-2362.2,-3140.15)
VIN on Bottom Layer "MB_VIN_B" (hatched 45Degree grid 7.87 track 8, remove dead copper, pour order 14): -2362.2,-3145.16 cw(c-2362.2,-3140.15) -2362.2,-3135.13 1544.98,-3135.13 1544.98,197.84 -2362.2,197.84 cw(c-2362.2,202.85) -2362.2,207.87 2362.2,207.87 cw(c2362.2,202.85) 2367.22,202.85 2367.22,-3140.15 cw(c2362.2,-3140.15) 2362.2,-3145.16
COM1 on Bottom Layer "LA_COM1_B" (hatched 90Degree grid 7.87 track 8, remove dead copper, pour order 18): -5255.01,-6835 ccw(c-5250,-6835) -5250,-6840.01 -4815,-6840.01 ccw(c-4815,-6835) -4811.44,-6838.53 -4811.45,-6838.55 -4587.92,-6615.01 -1217.08,-6615.01 -988.55,-6843.55 -988.56,-6843.53 ccw(c-985,-6840) -985,-6845.01 -600,-6845.01 ccw(c-600,-6840) -594.98,-6840 -594.98,-5895 ccw(c-600,-5895) -600,-5889.99 -1115,-5889.99 ccw(c-1115,-5895) -1118.56,-5891.47 -1118.55,-5891.45 -1198.55,-5971.45 -1198.53,-5971.44 ccw(c-1195,-5975) -1200.01,-5975 -1200.01,-6149.99 -4514.98,-6149.99 ccw(c-4520,-6150) -4516.45,-6146.45 -4771.45,-5891.45 -4771.44,-5891.47 ccw(c-4775,-5895) -4775,-5889.99 -5250,-5889.99 ccw(c-5250,-5895) -5255.01,-5895
GND on Bottom Layer "MB_GND_B" (hatched 45Degree grid 7.87 track 8, remove dead copper, pour order 13): -2362.2,-3145.16 cw(c-2362.2,-3140.15) -2362.2,-3135.13 1544.98,-3135.13 1544.98,197.84 -2362.2,197.84 cw(c-2362.2,202.85) -2362.2,207.87 2362.2,207.87 cw(c2362.2,202.85) 2367.22,202.85 2367.22,-3140.15 cw(c2362.2,-3140.15) 2362.2,-3145.16
GND on Top Layer "LC_GND_T" (hatched 90Degree grid 7.87 track 8, remove dead copper): -6115.01,-4765 -6115.01,-3855 cw(c-6110,-3855) -6113.53,-3851.44 -6113.55,-3851.45 -6088.55,-3826.45 -6088.56,-3826.47 cw(c-6085,-3830) -6085,-3824.98 -500,-3824.98 cw(c-500,-3830) -495,-3829.61 cw(c-490,-3830) -484.98,-3830 -484.98,-4765 cw(c-490,-4765) -490,-4770.01 -880,-4770.01 cw(c-880,-4765) -880.05,-4770.01 -6110,-4770.01 cw(c-6110,-4765)
GND on Top Layer "MB_GND_T" (hatched 45Degree grid 7.87 track 8, remove dead copper, pour order 12): -2362.2,-3140.15 2362.2,-3140.15 2362.2,202.85 -2362.2,202.85
COM1 on Top Layer "LA_COM1_T" (hatched 90Degree grid 7.87 track 8, remove dead copper, pour order 17): -5255.01,-6835 ccw(c-5250,-6835) -5250,-6840.01 -4815,-6840.01 ccw(c-4815,-6835) -4811.44,-6838.53 -4811.45,-6838.55 -4587.92,-6615.01 -1217.08,-6615.01 -988.55,-6843.55 -988.56,-6843.53 ccw(c-985,-6840) -985,-6845.01 -600,-6845.01 ccw(c-600,-6840) -594.98,-6840 -594.98,-5895 ccw(c-600,-5895) -600,-5889.99 -1115,-5889.99 ccw(c-1115,-5895) -1118.56,-5891.47 -1118.55,-5891.45 -1198.55,-5971.45 -1198.53,-5971.44 ccw(c-1195,-5975) -1200.01,-5975 -1200.01,-6149.99 -4514.98,-6149.99 ccw(c-4520,-6150) -4516.45,-6146.45 -4771.45,-5891.45 -4771.44,-5891.47 ccw(c-4775,-5895) -4775,-5889.99 -5250,-5889.99 ccw(c-5250,-5895) -5255.01,-5895

## Keep-outs
Keep-Out Layer:
  circle w10: c-3514.92,2816.85 r59.06
  circle w10: c-3514.92,2816.85 r118.11
  circle w10: c-3514.76,690.87 r59.06
  circle w10: c-3514.76,690.87 r118.11
  circle w10: c-90.74,690.47 r59.06
  circle w10: c-90.74,690.47 r118.11
  circle w10: c-89.73,2816.85 r59.06
  circle w10: c-89.73,2816.85 r118.11
  lines w10: -3672.4,2816.85 -3514.92,2816.85 -3514.92,2974.33 ; -3672.24,690.87 -3514.76,690.87 -3514.76,533.39 ; -3671.22,2555.04 -130.46,2555.04 ; -3573.24,954.3 -3573.24,2554.3 ; -3573.24,1003.72 -3573.24,955.09 -130.5,955.09 -130.46,955.04 -30.46,955.04 ; -90.74,532.99 -90.74,690.47 ; -89.73,2974.33 -89.73,2816.85 67.76,2816.85 ; -48.78,955.04 -30.46,955.04 ; -30.46,2555.04 -30.46,955.04 ; -30.29,955.2 -30.46,955.04 ; -3672.24,572.76 ccw(c-3632.64,572.76) -3632.64,533.16 27.37,533.16 ccw(c27.37,572.53) 66.74,572.53 66.74,2934.8 ccw(c27.37,2934.8) 27.37,2974.17 -3632.87,2974.17 ccw(c-3632.87,2934.8) -3672.24,2934.8 -3672.24,572.76

## Silkscreen, mask and mechanical layers (free items; w line width, h text height)
Top Overlay:
  lines w10: -927.9,-6776.15 -615.15,-6776.15 ; -927.9,-6737.15 -615.15,-6737.15 ; -927.9,-6698.15 -615.15,-6698.15 ; -927.9,-6659.15 -615.15,-6659.15 ; -927.9,-6620.15 -615.15,-6620.15 ; -927.9,-6503.15 -615.15,-6503.15 ; -927.9,-6464.15 -615.15,-6464.15 ; -927.9,-6425.15 -615.15,-6425.15 ; -927.9,-6347.15 -615.15,-6347.15 ; -927.9,-6308.15 -615.15,-6308.15 ; -927.9,-6269.15 -615.15,-6269.15 ; -927.9,-6230.15 -615.15,-6230.15 ; -927.9,-6191.15 -615.15,-6191.15 ; -927.9,-6152.15 -615.15,-6152.15 ; -927.9,-6113.15 -615.15,-6113.15 ; -927.9,-6035.15 -615.15,-6035.15 ; -927.9,-5957.15 -615.15,-5957.15 ; -751.01,-6581.15 -615.15,-6581.15 ; -747.73,-6542.15 -615.15,-6542.15 ; -615.15,-6815.15 -615.15,-5918.15
  lines w19.68: -927.9,-6815.15 -615.15,-6815.15 ; -927.9,-6776.15 -615.15,-6776.15 ; -927.9,-6737.15 -615.15,-6737.15 ; -927.9,-6698.15 -615.15,-6698.15 ; -927.9,-6659.15 -615.15,-6659.15 ; -927.9,-6620.15 -615.15,-6620.15 ; -927.9,-6581.15 -615.15,-6581.15 ; -927.9,-6542.15 -615.15,-6542.15 ; -927.9,-6503.15 -615.15,-6503.15 ; -927.9,-6464.15 -615.15,-6464.15 ; -927.9,-6425.15 -615.15,-6425.15 ; -927.9,-6386.15 -615.15,-6386.15 ; -927.9,-6347.15 -615.15,-6347.15 ; -927.9,-6308.15 -615.15,-6308.15 ; -927.9,-6269.15 -615.15,-6269.15 ; -927.9,-6230.15 -615.15,-6230.15 ; -927.9,-6191.15 -615.15,-6191.15 ; -927.9,-6152.15 -615.15,-6152.15 ; -927.9,-6113.15 -615.15,-6113.15 ; -927.9,-6074.15 -615.15,-6074.15 ; -927.9,-6035.15 -615.15,-6035.15 ; -927.9,-5996.15 -615.15,-5996.15 ; -927.9,-5957.15 -615.15,-5957.15 ; -927.9,-5918.15 -615.15,-5918.15
  text "PGD" at -429,-872 h20
  text "PGC" at -320,-872 h20
  text "MCLR" at -538,-873 h20
  text "GND" at 478,-941 h20 r270
  text "+3V3" at 244,-1142 h20
  text "+3V3" at 245,-1246 h20
  text "RB12" at 248,-1428 h20
  text "VCC" at 264,-1472 h20
  text "MOSI" at -1038.19,-1753.15 h20
  text "MISO" at -788.19,-1803.15 h20
  text "PGC" at -2250,-2300 h20
  text "Music Research Dept." at -2250,-2400 h60
  text "AG Funds Ltd." at -2250,-2500 h60
  text "Auckland NZ" at -2250,-2600 h60
  text "adrian.gin@gmail.com" at -2250,-2700 h60
  text "RevA" at -5434.92,-3908.49 h20
  text "D" at -5759.92,-3918.15 h20
  text "C" at -5679.92,-3918.15 h20
  text "B" at -5599.92,-3918.15 h20
  text "A" at -5519.92,-3918.15 h20
  text "adrian.gin@gmail.com" at -5434.92,-3943.15 h20
  text "MISO" at -5898.19,-4003.15 h20
  text "LAT" at -5899.19,-4079.15 h20
  text "DAT" at -5899.92,-4161.19 h20
  text "GND" at -5899.92,-4239.93 h20
  text "VCC" at -5894.92,-4350.17 h20
  text "RevA" at -2630.92,-6192.83 h20
  text "adrian.gin@gmail.com" at -2630.92,-6227.49 h20
Top Paste:
  lines w10: -5232.47,-6776.15 -4919.71,-6776.15 ; -5232.47,-6737.15 -4919.71,-6737.15 ; -5232.47,-6698.15 -4919.71,-6698.15 ; -5232.47,-6659.15 -4919.71,-6659.15 ; -5232.47,-6620.15 -4919.71,-6620.15 ; -5232.47,-6503.15 -4919.71,-6503.15 ; -5232.47,-6425.15 -4919.71,-6425.15 ; -5232.47,-6347.15 -4919.71,-6347.15 ; -5232.47,-6308.15 -4919.71,-6308.15 ; -5232.47,-6269.15 -4919.71,-6269.15 ; -5232.47,-6230.15 -4919.71,-6230.15 ; -5232.47,-6191.15 -4919.71,-6191.15 ; -5232.47,-6152.15 -4919.71,-6152.15 ; -5232.47,-6113.15 -4919.71,-6113.15 ; -5232.47,-6035.15 -4919.71,-6035.15 ; -5232.47,-5957.15 -4919.71,-5957.15
  lines w19.68: -5232.47,-6815.15 -4919.71,-6815.15 ; -5232.47,-6776.15 -4919.71,-6776.15 ; -5232.47,-6737.15 -4919.71,-6737.15 ; -5232.47,-6698.15 -4919.71,-6698.15 ; -5232.47,-6659.15 -4919.71,-6659.15 ; -5232.47,-6620.15 -4919.71,-6620.15 ; -5232.47,-6581.15 -4919.71,-6581.15 ; -5232.47,-6542.15 -4919.71,-6542.15 ; -5232.47,-6503.15 -4919.71,-6503.15 ; -5232.47,-6464.15 -4919.71,-6464.15 ; -5232.47,-6425.15 -4919.71,-6425.15 ; -5232.47,-6386.15 -4919.71,-6386.15 ; -5232.47,-6347.15 -4919.71,-6347.15 ; -5232.47,-6308.15 -4919.71,-6308.15 ; -5232.47,-6269.15 -4919.71,-6269.15 ; -5232.47,-6230.15 -4919.71,-6230.15 ; -5232.47,-6191.15 -4919.71,-6191.15 ; -5232.47,-6152.15 -4919.71,-6152.15 ; -5232.47,-6113.15 -4919.71,-6113.15 ; -5232.47,-6074.15 -4919.71,-6074.15 ; -5232.47,-6035.15 -4919.71,-6035.15 ; -5232.47,-5996.15 -4919.71,-5996.15 ; -5232.47,-5957.15 -4919.71,-5957.15 ; -5232.47,-5918.15 -4919.71,-5918.15
Bottom Paste:
  lines w10: -827.76,-4706 -515,-4706 ; -827.76,-4667 -515,-4667 ; -827.76,-4628 -515,-4628 ; -827.76,-4589 -515,-4589 ; -827.76,-4550 -515,-4550 ; -827.76,-4433 -515,-4433 ; -827.76,-4394 -515,-4394 ; -827.76,-4355 -515,-4355 ; -827.76,-4316 -515,-4316 ; -827.76,-4277 -515,-4277 ; -827.76,-4238 -515,-4238 ; -827.76,-4199 -515,-4199 ; -827.76,-4160 -515,-4160 ; -827.76,-4121 -515,-4121 ; -827.76,-4082 -515,-4082 ; -827.76,-4043 -515,-4043 ; -827.76,-3965 -515,-3965 ; -827.76,-3887 -515,-3887
  lines w19.68: -927.9,-6815.15 -615.15,-6815.15 ; -927.9,-6776.15 -615.15,-6776.15 ; -927.9,-6737.15 -615.15,-6737.15 ; -927.9,-6698.15 -615.15,-6698.15 ; -927.9,-6659.15 -615.15,-6659.15 ; -927.9,-6620.15 -615.15,-6620.15 ; -927.9,-6581.15 -615.15,-6581.15 ; -927.9,-6542.15 -615.15,-6542.15 ; -927.9,-6503.15 -615.15,-6503.15 ; -927.9,-6464.15 -615.15,-6464.15 ; -927.9,-6425.15 -615.15,-6425.15 ; -927.9,-6386.15 -615.15,-6386.15 ; -927.9,-6347.15 -615.15,-6347.15 ; -927.9,-6308.15 -615.15,-6308.15 ; -927.9,-6269.15 -615.15,-6269.15 ; -927.9,-6231.66 -615.15,-6231.66 ; -927.9,-6191.15 -615.15,-6191.15 ; -927.9,-6152.15 -615.15,-6152.15 ; -927.9,-6112.15 -615.15,-6112.15 ; -927.9,-6074.15 -615.15,-6074.15 ; -927.9,-6035.15 -615.15,-6035.15 ; -927.9,-5996.15 -615.15,-5996.15 ; -927.9,-5957.15 -615.15,-5957.15 ; -927.9,-5918.15 -615.15,-5918.15 ; -827.76,-4745 -515,-4745 ; -827.76,-4706 -515,-4706 ; -827.76,-4667 -515,-4667 ; -827.76,-4628 -515,-4628 ; -827.76,-4589 -515,-4589 ; -827.76,-4550 -515,-4550 ; -827.76,-4511 -515,-4511 ; -827.76,-4472 -515,-4472 ; -827.76,-4433 -515,-4433 ; -827.76,-4394 -515,-4394 ; -827.76,-4355 -515,-4355 ; -827.76,-4316 -515,-4316 ; -827.76,-4277 -515,-4277 ; -827.76,-4238 -515,-4238 ; -827.76,-4199 -515,-4199 ; -827.76,-4160 -515,-4160 ; -827.76,-4121 -515,-4121 ; -827.76,-4082 -515,-4082 ; -827.76,-4043 -515,-4043 ; -827.76,-4004 -515,-4004 ; -827.76,-3965 -515,-3965 ; -827.76,-3926 -515,-3926 ; -827.76,-3887 -515,-3887 ; -827.76,-3848 -515,-3848
Top Solder:
  lines w10: -5232.47,-6776.15 -4919.71,-6776.15 ; -5232.47,-6737.15 -4919.71,-6737.15 ; -5232.47,-6698.15 -4919.71,-6698.15 ; -5232.47,-6659.15 -4919.71,-6659.15 ; -5232.47,-6620.15 -4919.71,-6620.15 ; -5232.47,-6503.15 -4919.71,-6503.15 ; -5232.47,-6425.15 -4919.71,-6425.15 ; -5232.47,-6347.15 -4919.71,-6347.15 ; -5232.47,-6308.15 -4919.71,-6308.15 ; -5232.47,-6269.15 -4919.71,-6269.15 ; -5232.47,-6230.15 -4919.71,-6230.15 ; -5232.47,-6191.15 -4919.71,-6191.15 ; -5232.47,-6152.15 -4919.71,-6152.15 ; -5232.47,-6113.15 -4919.71,-6113.15 ; -5232.47,-6035.15 -4919.71,-6035.15 ; -5232.47,-5957.15 -4919.71,-5957.15
  lines w19.68: -5232.47,-6815.15 -4919.71,-6815.15 ; -5232.47,-6776.15 -4919.71,-6776.15 ; -5232.47,-6737.15 -4919.71,-6737.15 ; -5232.47,-6698.15 -4919.71,-6698.15 ; -5232.47,-6659.15 -4919.71,-6659.15 ; -5232.47,-6620.15 -4919.71,-6620.15 ; -5232.47,-6581.15 -4919.71,-6581.15 ; -5232.47,-6542.15 -4919.71,-6542.15 ; -5232.47,-6503.15 -4919.71,-6503.15 ; -5232.47,-6464.15 -4919.71,-6464.15 ; -5232.47,-6425.15 -4919.71,-6425.15 ; -5232.47,-6386.15 -4919.71,-6386.15 ; -5232.47,-6347.15 -4919.71,-6347.15 ; -5232.47,-6308.15 -4919.71,-6308.15 ; -5232.47,-6269.15 -4919.71,-6269.15 ; -5232.47,-6230.15 -4919.71,-6230.15 ; -5232.47,-6191.15 -4919.71,-6191.15 ; -5232.47,-6152.15 -4919.71,-6152.15 ; -5232.47,-6113.15 -4919.71,-6113.15 ; -5232.47,-6074.15 -4919.71,-6074.15 ; -5232.47,-6035.15 -4919.71,-6035.15 ; -5232.47,-5996.15 -4919.71,-5996.15 ; -5232.47,-5957.15 -4919.71,-5957.15 ; -5232.47,-5918.15 -4919.71,-5918.15
Bottom Solder:
  lines w10: -827.76,-4706 -515,-4706 ; -827.76,-4667 -515,-4667 ; -827.76,-4628 -515,-4628 ; -827.76,-4589 -515,-4589 ; -827.76,-4550 -515,-4550 ; -827.76,-4433 -515,-4433 ; -827.76,-4394 -515,-4394 ; -827.76,-4355 -515,-4355 ; -827.76,-4316 -515,-4316 ; -827.76,-4277 -515,-4277 ; -827.76,-4238 -515,-4238 ; -827.76,-4199 -515,-4199 ; -827.76,-4160 -515,-4160 ; -827.76,-4121 -515,-4121 ; -827.76,-4082 -515,-4082 ; -827.76,-4043 -515,-4043 ; -827.76,-3965 -515,-3965 ; -827.76,-3887 -515,-3887
  lines w19.68: -927.9,-6815.15 -615.15,-6815.15 ; -927.9,-6776.15 -615.15,-6776.15 ; -927.9,-6737.15 -615.15,-6737.15 ; -927.9,-6698.15 -615.15,-6698.15 ; -927.9,-6659.15 -615.15,-6659.15 ; -927.9,-6620.15 -615.15,-6620.15 ; -927.9,-6581.15 -615.15,-6581.15 ; -927.9,-6542.15 -615.15,-6542.15 ; -927.9,-6503.15 -615.15,-6503.15 ; -927.9,-6464.15 -615.15,-6464.15 ; -927.9,-6425.15 -615.15,-6425.15 ; -927.9,-6386.15 -615.15,-6386.15 ; -927.9,-6347.15 -615.15,-6347.15 ; -927.9,-6308.15 -615.15,-6308.15 ; -927.9,-6269.15 -615.15,-6269.15 ; -927.9,-6231.66 -615.15,-6231.66 ; -927.9,-6191.15 -615.15,-6191.15 ; -927.9,-6152.15 -615.15,-6152.15 ; -927.9,-6112.15 -615.15,-6112.15 ; -927.9,-6074.15 -615.15,-6074.15 ; -927.9,-6035.15 -615.15,-6035.15 ; -927.9,-5996.15 -615.15,-5996.15 ; -927.9,-5957.15 -615.15,-5957.15 ; -927.9,-5918.15 -615.15,-5918.15 ; -827.76,-4745 -515,-4745 ; -827.76,-4706 -515,-4706 ; -827.76,-4667 -515,-4667 ; -827.76,-4628 -515,-4628 ; -827.76,-4589 -515,-4589 ; -827.76,-4550 -515,-4550 ; -827.76,-4511 -515,-4511 ; -827.76,-4472 -515,-4472 ; -827.76,-4433 -515,-4433 ; -827.76,-4394 -515,-4394 ; -827.76,-4355 -515,-4355 ; -827.76,-4316 -515,-4316 ; -827.76,-4277 -515,-4277 ; -827.76,-4238 -515,-4238 ; -827.76,-4199 -515,-4199 ; -827.76,-4160 -515,-4160 ; -827.76,-4121 -515,-4121 ; -827.76,-4082 -515,-4082 ; -827.76,-4043 -515,-4043 ; -827.76,-4004 -515,-4004 ; -827.76,-3965 -515,-3965 ; -827.76,-3926 -515,-3926 ; -827.76,-3887 -515,-3887 ; -827.76,-3848 -515,-3848
Mechanical 15:
  lines w10: -6110,-4295 -4385,-4295 -4265,-4295 -4265,-4765 ; -975,-3830 -500,-3830 -490,-3830 ; -950,-3830 -6085,-3830 -6110,-3855 -6110,-4765 -850,-4765 ; -880,-4765 -490,-4765 -490,-3830 ; 1550,-3140.15 1550,202.85 ; -490,-3830 -490,-3830 ; 2362.2,-3140.15 2362.2,202.85 ; 2362.2,-3140.15 -2362.2,-3140.15 -2362.2,202.85 2362.2,202.85 ; 2362.2,-3140.15 2362.2,202.85 ; -5250,-6835 -4815,-6835 -4590,-6610 -1215,-6610 -985,-6840 -600,-6840 -600,-5895 -1115,-5895 -1195,-5975 -1195,-6155 -4515,-6155 -4520,-6150 -4775,-5895 -5250,-5895 -5250,-6835 ; -1500,-2150 -1402.53,-2247.47 800,-2247.47 800,-2050 750,-2000 750,-900 600,-750 -750,-750 -900,-900 -1500,-900 -1500,-2150

## Text inside footprints (layer, text, board x,y; h text height)
C16: Top Overlay "+" at 1800.23,-2442.16 h59.06
C17: Top Overlay "+" at 340.08,-498.15 h59.06 r90
P1: Top Overlay "32" at -1059.92,-2068.15 h50 r180; Top Overlay "31" at -1049.92,-1768.15 h50 r180; Top Overlay "1" at 500.08,-1773.15 h50 r180; Top Overlay "2" at 510.08,-1973.15 h50 r180
P2: Top Overlay "8" at -900.92,-1263.15 h50 r90; Top Overlay "7" at -709.92,-1253.15 h50 r90; Top Overlay "1" at -769.92,-1718.15 h50 r90; Top Overlay "2" at -869.92,-1733.15 h50 r90
P3: Top Overlay "8" at 465.08,-1503.15 h50 r270; Top Overlay "1" at 370.08,-1043.15 h50 r270; Top Overlay "2" at 465.08,-1028.15 h50 r270
U5: Top Overlay "1" at 1347.35,-1612.4 h59.06 r180; Top Overlay "2" at 1157.19,-1612.4 h59.06 r180; Top Overlay "3" at 1257.19,-1612.4 h59.06 r180